# Altium PCB PCB.PcbDoc
Units mm, origin at the board's own origin, x right, y up, seen from the top; angles counter-clockwise.
Board outline 62.03 x 125.5 mm, 2 copper layers (Top Layer, Bottom Layer); 54 components, 45 nets, 173 pads, 278 vias.
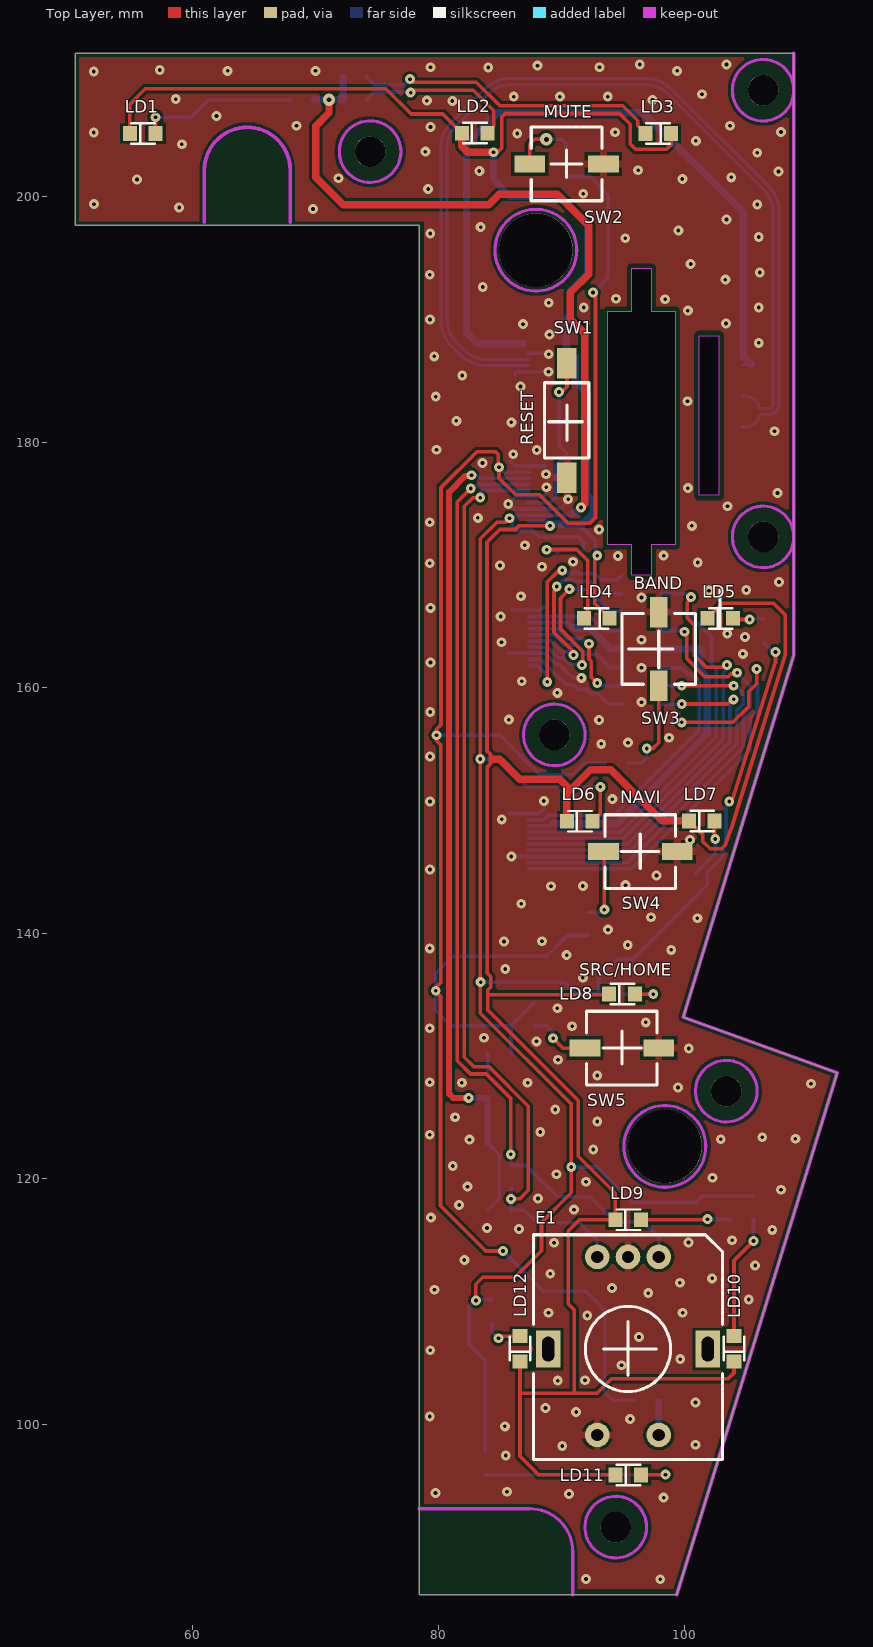
[diagram p0: Top Layer view]
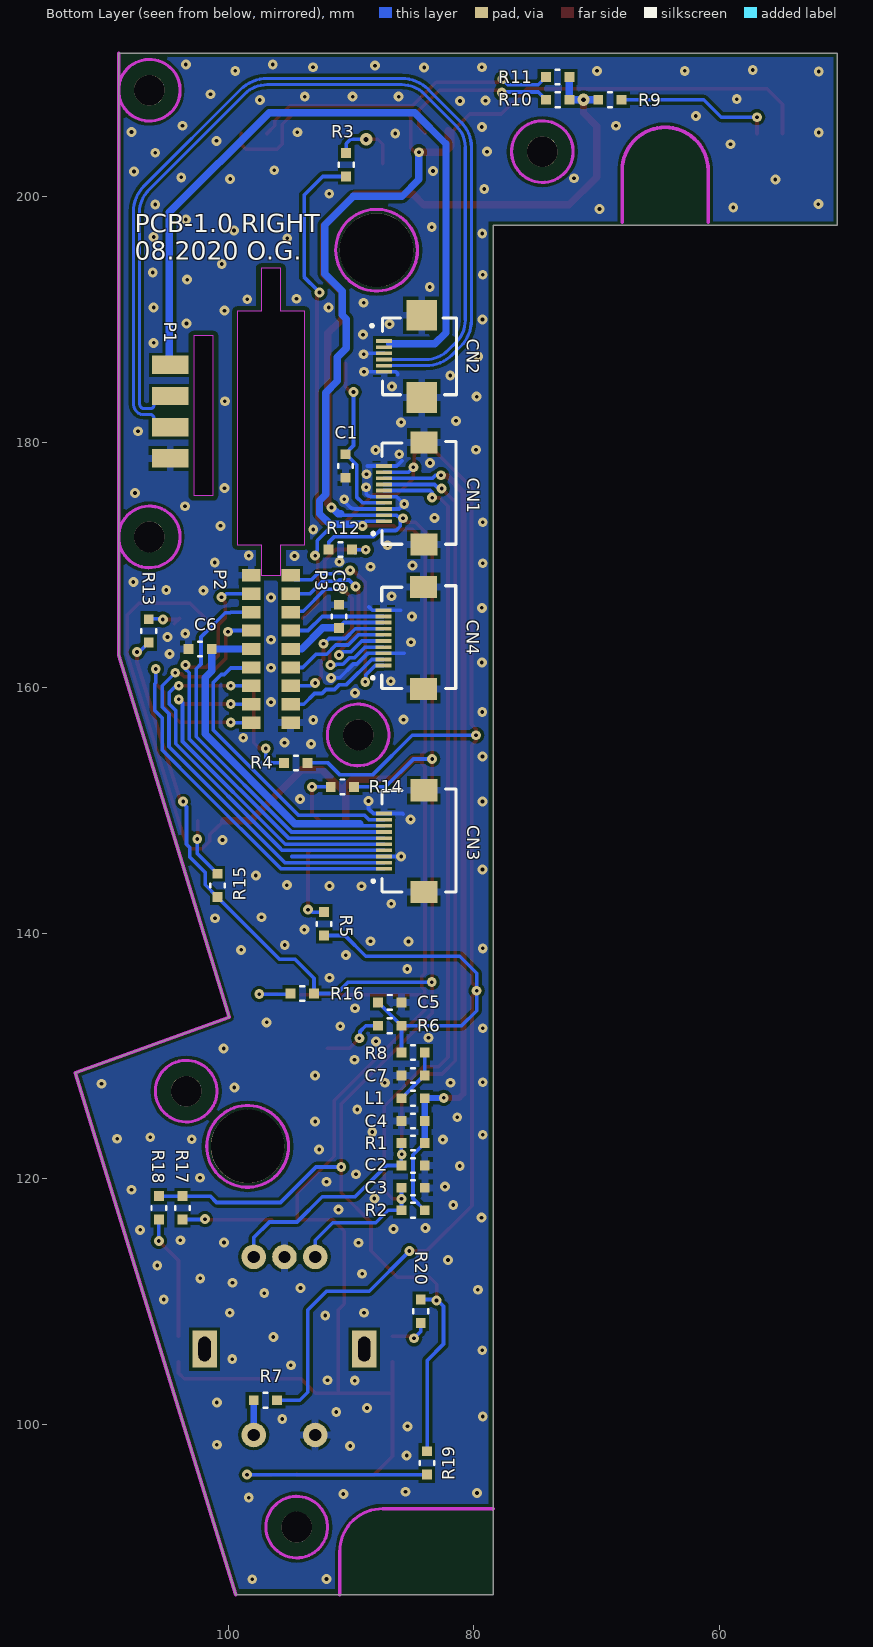
[diagram p1: Bottom Layer view, seen from below]
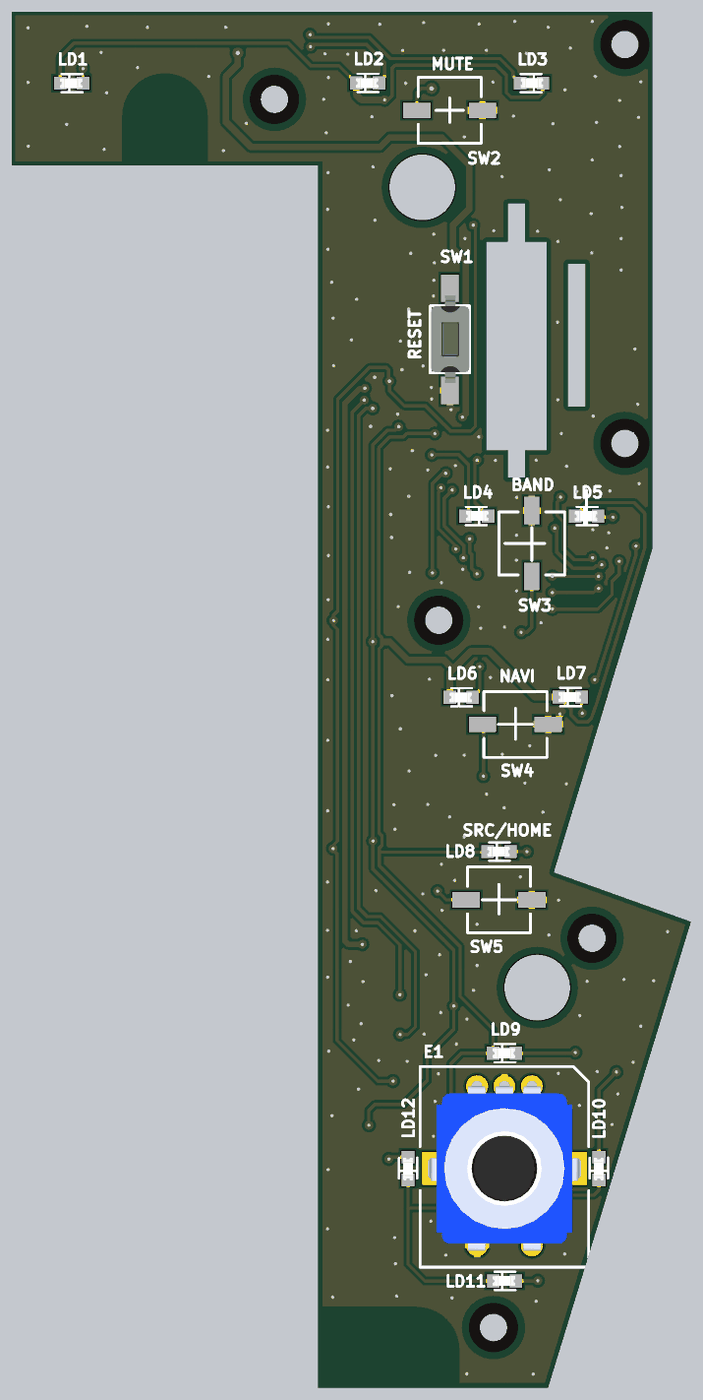
[diagram p2: 3D render of the assembled board from above, using the file's embedded part models]
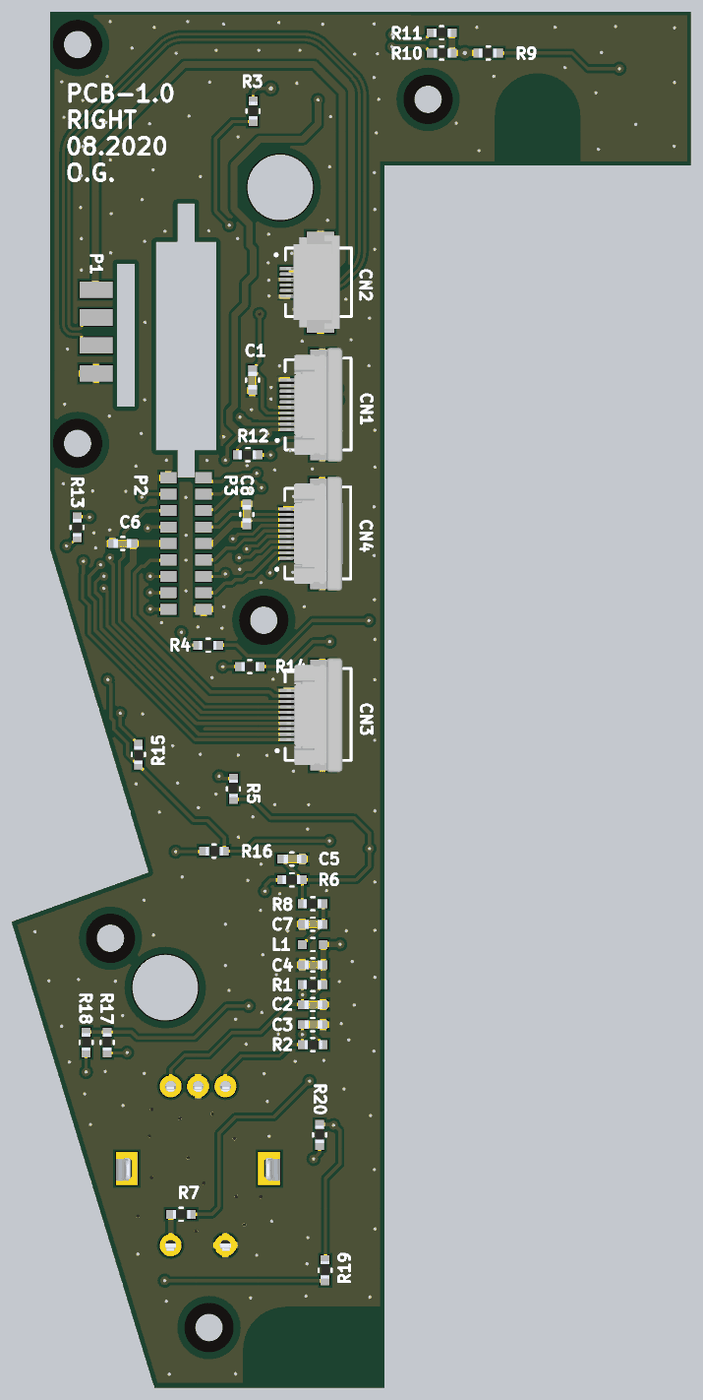
[diagram p3: 3D render of the assembled board from below, using the file's embedded part models]

## Layer stack, top to bottom
Top Solder: solder mask 0.0102, Solder Resist, Dk 3.5
Top Layer: signal copper 0.0356
Dielectric 1: dielectric 0.32, FR-4, Dk 4.8
Bottom Layer: signal copper 0.0356
Bottom Solder: solder mask 0.0102, Solder Resist, Dk 3.5

## Board outline
50.425,211.65 50.425,197.65 78.425,197.65 78.425,86.15 99.4,86.15 112.45,128.65 99.925,133.15 108.925,162.65 108.925,211.65
cut-out: 101.225,188.65 102.825,188.65 102.825,175.65 101.225,175.65
cut-out: 93.775,190.65 95.725,190.65 95.725,194.15 97.325,194.15 97.325,190.65 99.275,190.65 99.275,171.65 97.325,171.65 97.325,169.15 95.725,169.15 95.725,171.65 93.775,171.65

## Design rules (kind name [scope] priority, off if disabled: settings)
Clearance [All] p1: gap=0.2 ignorepadtopadclearanceinfootprint=FALSE except(0.25: Arc-Fill Arc-Poly Arc-Region Track-Fill Track-Poly Track-Region SMDPad-Fill SMDPad-Poly SMDPad-Region THPad-Fill THPad-Poly THPad-Region Via-Fill Via-Poly Via-Region; 0.4: Fill-Fill Fill-Poly Fill-Region Poly-Poly Poly-Region Region-Region)
ComponentClearance [All] p1 off: gap=0.254 collisioncheckmode=3 verticalgap=0.254 showdistances=FALSE
DiffPairsRouting [All] p1: maxlimit=0.25 minlimit=0.25 mostfreqgap=0.25 toplayer_minwidth=0.25 toplayer_maxwidth=0.25 toplayer_prefwidth=0.25 bottomlayer_minwidth=0.25 bottomlayer_maxwidth=0.25 bottomlayer_prefwidth=0.25 maxuncoupledlength=12.7
PolygonConnect [All] p1: thpad.connectstyle=Relief thpad.reliefconductorwidth=0.6 thpad.reliefentries=4 thpad.polygonreliefangle="90 Angle" thpad.airgapwidth=0.254 smdpad.connectstyle=Relief smdpad.reliefconductorwidth=0.6 smdpad.reliefentries=4 smdpad.polygonreliefangle="90 Angle" smdpad.airgapwidth=0.254 via.connectstyle=Direct via.reliefconductorwidth=0.254 via.reliefentries=4 via.polygonreliefangle="90 Angle" via.airgapwidth=0.254
RoomDefinition right_panel [InComponentClass('right_panel')] p1 off: confinementstyle=ConfineIn formatcopy=TRUE lockcomponents=FALSE outline 113.581,87.554 131.75,87.554 131.75,97.5 113.581,97.5
RoutingVias [All] p1: holewidth=0.711 width=1.27 viastyle="Through Hole" minholewidth=0.711 minwidth=1.27 maxholewidth=0.711 maxwidth=1.27
SolderMaskExpansion [All] p1: expansion=0.102
Width [All] p1: maxlimit=2 minlimit=0.3 preferedwidth=0.3 minimp=50.000000 maximp=50.000000 favimp=50.000000
28 further rules are at their usual default settings.

## Classes and differential pairs
differential pair USBD_D: +USBD_D_P -USBD_D_N

## Components (designator, comment, footprint, x,y, rotation, side; value= is the part's Value field where it differs from the comment)
C1 "CL10B103KB8NNNC" C0603 90.45,179 r270 bottom value=0.01uF
C2 "CL10B103KB8NNNC" C0603 85.905,121.1 r180 bottom value=0.01uF
C3 "CL10B103KB8NNNC" C0603 85.9,119.275 r180 bottom value=0.01uF
C4 "CC0603KRX7R9BB104" C0603 85.9,124.725 r180 bottom value=0.1uF
C5 "C1608X7R1H104K080AA" C0603 87.805,134.375 r180 bottom value=0.1uF
C6 "C1608X7R1H104K080AA" C0603 101.345,163.15 r0 bottom value=0.1uF
C7 "C1608X7R1H104K080AA" C0603 85.9,128.425 r180 bottom value=0.1uF
C8 "C1608X7R1H104K080AA" C0603 90.975,164.85 r90 bottom value=0.1uF
CN1 "HDR10" 10S-0.5SH 84.325,175.9 r90 bottom locked
CN2 "USB" 6S-0.5SH 87.3,186.975 r90 bottom locked
CN3 "SDMMC0" 10S-0.5SH 84.325,147.6 r90 bottom locked
CN4 "SDMMC1" 10S-0.5SH 84.35,164.15 r90 bottom locked
E1 "TUNE/EQ" "Rotary Encoder" 95.425,106.15 r180 top locked
L1 "BLM18AG102SN1D" IND0603 83.995,126.575 r0 bottom value=EMIF
LD1 "LED_R" LED0805 54.993,205.125 r0 top locked
LD2 "LED_R" LED0805 82.018,205.15 r0 top locked
LD3 "LED_R" LED0805 98.807,205.125 r180 top locked
LD4 "LED_R" LED0805 93.807,165.65 r180 top locked
LD5 "LED_R" LED0805 102.018,165.65 r0 top locked
LD6 "LED_R" LED0805 90.566,149.125 r0 top
LD7 "LED_R" LED0805 100.518,149.15 r0 top locked
LD8 "LED_R" LED0805 94.018,135.05 r0 top locked
LD9 "LED_R" LED0805 94.518,116.675 r0 top locked
LD10 "LED_R" LED0805 104.05,105.243 r90 top locked
LD11 "LED_R" LED0805 94.525,95.9 r0 top locked
LD12 "LED_R" LED0805 86.625,105.243 r90 top locked
P1 "USB DBG" CUSTOM-4-PADS-2.54 104.725,186.29 r270 bottom locked
P2 "GPS_SD0" CUSTOM-9-PADS-1.5 98.125,163.15 r90 bottom locked
P3 "DVD_SD1" CUSTOM-9-PADS-1.5 94.925,163.15 r90 bottom locked
R1 "10k" R0603 83.995,122.925 r0 bottom
R2 "10k" R0603 85.9,117.45 r180 bottom
R3 "15k" R0603 90.4,201.625 r90 bottom
R4 "10k" R0603 93.545,153.875 r0 bottom
R5 "6.8k" R0603 92.2,139.82 r90 bottom
R6 "3k" R0603 85.9,132.475 r0 bottom
R7 "20k" R0603 97.93,101.975 r180 bottom
R8 "10k" R0603 83.995,130.3 r0 bottom
R9 "620" R0603 67.97,207.875 r0 bottom
R10 "620" R0603 74.125,207.875 r180 bottom
R11 "620" R0603 74.13,209.725 r180 bottom
R12 "620" R0603 89.925,171.25 r0 bottom
R13 "620" R0603 106.475,165.575 r270 bottom
R14 "620" R0603 91.655,151.925 r180 bottom
R15 "620" R0603 100.875,144.85 r270 bottom
R16 "620" R0603 94.925,135.1 r180 bottom
R17 "620" R0603 103.725,116.695 r90 bottom
R18 "620" R0603 105.65,116.695 r90 bottom
R19 "620" R0603 83.825,95.92 r90 bottom
R20 "620" R0603 84.325,108.27 r90 bottom
SW1 "RESET" TACTM-34N-F 90.45,181.65 r90 top locked value="SW tact 2-pin"
SW2 "MUTE" 6X6-SMT-2PIN 90.425,202.65 r180 top locked value="SW tact 2-pin"
SW3 "BAND" 6X6-SMT-2PIN 97.925,163.15 r270 top value="SW tact 2-pin"
SW4 "NAVI" 6X6-SMT-2PIN 96.425,146.65 r180 top locked value="SW tact 2-pin"
SW5 "SRC" 6X6-SMT-2PIN 94.925,130.65 r180 top locked value="SW tact 2-pin"

## Footprints (in the part's own frame and the unit in brackets; to place one, negate y for a bottom-side part, rotate by r counter-clockwise, add the part's x,y. Pads: shape width x height; smd on the part's side, far side on the other; paste and mask are expansions set on the pad)
6S-0.5SH [mm]
  rect 0.3x1.3 smd: 1(1.25,0) 2(0.75,0) 3(0.25,0) 4(-0.25,0) 5(-0.75,0) 6(-1.25,0)
  rect 2.5x2.5 smd: ""(-3.35,-3.05) ""(3.35,-3.05)
  silkscreen extent -3.12,-5.87 3.12,1.1, body extent -4.25,-4.8 4.25,0.1, height 1.9
6X6-SMT-2PIN [mm]
  rect 2.5x1.4 smd: 1(-3,0) 2(3,0)
  silkscreen extent -2.88,-3 2.88,3, body extent -2.88,-3 2.88,2.98, height 5
10S-0.5SH [mm]
  rect 0.3x1.3 smd: 1(-2.35,3) 2(-1.85,3) 3(-1.35,3) 4(-0.85,3) 5(-0.35,3) 6(0.15,3) 7(0.65,3) 8(1.15,3) 9(1.65,3) 10(2.15,3)
  rect 1.8x2.2 smd: ""(-4.25,-0.25) ""(4.05,-0.25)
  silkscreen extent -4.23,-2.88 4.15,3.98, body extent -5.31,-2.11 5.12,3, height 2.1
C0603 [mm]
  rect 0.8x0.8 smd: 1(1.905,0) 2(0,0)
  silkscreen extent 0.8,-0.6 1.1,0.6, body extent 0.2,-0.4 1.8,0.4, height 0.9
CUSTOM-4-PADS-2.54 [mm] "Connector; Header; 4 Position"
  rect 1.5x3 smd: 1(0,0) 2(2.54,0) 3(5.08,0) 4(7.62,0)
CUSTOM-9-PADS-1.5 [mm] "9 Positions"
  rect 1x1.5 smd: 1(-6,0) 2(-4.5,0) 3(-3,0) 4(-1.5,0) 5(0,0) 6(1.5,0) 7(3,0) 8(4.5,0) 9(6,0)
IND0603 [mm]
  rect 0.8x0.8 smd: 1(1.905,0) 2(0,0)
  silkscreen extent 0.8,-0.6 1.1,0.6
LED0805 [mm]
  rect 1.14x1.2 smd: 1(-0.127,0) 2(1.957,0)
  silkscreen extent 0,-0.83 1.91,0.84, body extent -0.16,-0.46 1.9,0.45, height 0.85
R0603 [mm]
  rect 0.8x0.8 smd: 1(1.905,0) 2(0,0)
  silkscreen extent 0.8,-0.6 1.1,0.6, body extent 0.2,-0.4 1.8,0.4, height 0.5
"Rotary Encoder" [mm] "Rotary Encoder - SW"
  round 2 hole 1: 1(-2.5,-7.5) 2(0,-7.5) 3(2.5,-7.5) 4(2.5,7) 5(-2.5,7)
  rect 2x3 hole 1 slot 2 at 90 deg: MP1(-6.5,0) MP2(6.5,0)
  silkscreen extent -7.7,-9.3 7.7,9, body extent -7.5,-7.5 7.5,7.5, height 16.2
TACTM-34N-F [mm]
  rect 2.5x1.6 smd: 1(-4.545,0) 2(4.778,0)
  silkscreen extent -2.95,-1.78 3.17,1.82, body extent -3.88,-1.78 4.13,1.73, height 5.5

## Part data
C1 C2 C3 C4 C5 C6 C7 C8: library part CAP_NPOL, "CAP_NPOL"
CN1 CN3 CN4: library part "HDR 10", "Header, 10-Pin", LatestRevisionDate=17-Jul-2002, LatestRevisionNote="Re-released for DXP Platform.", Publisher="Altium Limited"
CN2: library part "HDR 6", "Header, 6-Pin", LatestRevisionDate=17-Jul-2002, LatestRevisionNote="Re-released for DXP Platform.", Publisher="Altium Limited"
E1: library part ENC_SW, "ENC_SW"
L1: library part IND_WO_IRON, "IND_WO_IRON"
LD1 LD2 LD3 LD4 LD5 LD6 LD7 LD8 LD9 LD10 LD11 LD12: library part LED_RED, "LED Red"
P1: library part "HDR 4", "Header, 4-Pin", LatestRevisionDate=17-Jul-2002, LatestRevisionNote="Re-released for DXP Platform.", Publisher="Altium Limited"
P2 P3: library part "HDR 9", "Header, 9-Pin", LatestRevisionDate=17-Jul-2002, LatestRevisionNote="Re-released for DXP Platform.", Publisher="Altium Limited"
R1 R2 R3 R4 R5 R6 R7 R8 R9 R10 R11 R12 R13 R14 R15 R16 R17 R18 R19 R20: library part RESISTOR, "RES"
SW1 SW2 SW3 SW4 SW5: library part "SW tact 2-pin", "Microswitches, DTSMB-3 series"

## Free pads (board coordinates)
  round 2.5 hole 2.5 unplated mask+1: MH(74.425,203.65) MH(89.425,156.15) MH(94.425,91.65) MH(103.425,127.15) MH(106.425,172.275) MH(106.425,208.65)
  round 6 hole 6 unplated: MH(87.925,195.625) MH(98.425,122.65)

## Via types
v1: diameter 0.8, hole 0.3, Top Layer to Bottom Layer, tented both sides, 276 vias
v2: diameter 1, hole 0.4, Top Layer to Bottom Layer, tented both sides, 2 vias

## Nets (pads, with @x,y where several pads share a name; then routed paths per layer and width w, separated by ;. In a path a pad name is that pad's centre, name@x,y a point inside that pad or via, vN(x,y) a via of type N, cw(c..) or ccw(c..) an arc to the next point about the centre after c; other vN are vias at no path point)
ENC_TUNE_A: C2.2 CN1.7 E1.1 R1.1 | length 79.9
  Top Layer w0.3: v1(82.625,176.225) 81.525,175.125 81.525,129.625 82.6,128.55 83.875,128.55 85.875,126.55 v1(85.875,122)
  Bottom Layer w0.3: v1(82.625,176.225) 82.875,176.225 83.2,176.55 CN1.7 ; R1.1 85.905,122.92 C2.2 87.125,121.1 89.675,118.55 92.35,118.55 94.4,116.5 96.65,116.5 97.925,115.225 E1.1
ENC_TUNE_B: C3.2 CN1.6 E1.3 R2.2 | length 77.5
  Top Layer w0.3: v1(83.4,175.475) 82.8,175.475 82.1,174.775 82.1,129.9 82.875,129.125 84.1,129.125 87.3,125.925 87.3,119.075 86.6,118.375 v1(85.9,118.375)
  Bottom Layer w0.3: v1(83.4,175.475) 83.4,175.9 83.55,176.05 CN1.6 ; C3.2 v1(85.9,118.375) R2.2 86.975,117.45 88,116.425 91.5,116.425 92.925,115 E1.3
GND: C1.1 C2.1 C3.1 C4.2 C5.1 C6.1 C7.2 C8.1 CN1. CN1.3 CN1.5 CN1.10 CN2. CN2.3 CN2.6 CN3. CN3.3 CN3.10 CN4. CN4.3 CN4.10 E1.2 E1.4 P1.4 P2.9 P3.1 SW1.1 SW2.1 SW3.1 SW4.1 SW5.1 | length 39.1
  Bottom Layer w0.3: 85.675,162.8 CN4.3 88.668,162.8 89.543,161.925 89.8,161.925 90.925,160.8 v1(91.625,160.8) ; 85.75,149.7 85.8,149.75 CN3.10 88.174,149.75 88.575,150.151 v1(88.575,150.775) ; 85.85,178.475 86.275,178.05 CN1.10 88.675,178.05 ; v1(85.925,146.25) CN3.3 94.825,146.25 ; 85.95,166.3 CN4.10 88.275,166.3 88.55,166.575 ; 86.2,185.475 86.2,185.574 86.351,185.725 CN2.6 v1(88.95,185.725) ; CN2.3 88.9,187.225 v1(88.975,187.15) ; v1(88.775,176.325) 88.775,175.75 cw(c88.292,176.233) 88.292,175.55 CN1.5 86.275,175.55 v1(85.675,174.95) 85.701,174.95 86.101,174.55 CN1.3 89.667,174.55 ccw(c89.667,175.233) 90.15,174.75 90.409,175.009 ccw(c90.067,175.35) v1(90.55,175.35)
  other v1: 98.05,87.4 92,87.425 98.325,94.05 90.625,94.35 79.75,94.425 85.575,94.525 85.475,97.475 90.075,98.25 100.925,98.35 85.4,99.85 95.6,100.45 79.275,100.65 91.2,101.025 88.7,101.35 100.925,101.8 89.7,103.575 91.925,103.6 94.9,104.825 99.675,105.325 79.325,106.05 96.325,107.125 92.1,108.875 88.95,109.1 99.875,109.1 105.25,110.175 97.075,110.7 79.675,110.975 94.125,111.125 99.65,111.55 102.275,111.9 89.1,112.275 105.775,112.95 82.1,113.4 89.4,114.8 100.35,114.825 103.9,115 107.175,115.85 86.55,115.925 83.95,116 79.375,116.85 91.025,117.5 81.675,117.875 88.1,118.4 107.875,119.125 82.35,119.375 92,119.775 102.3,120.1 89.6,120.375 81.15,121.05 92.6,122.4 82.525,123.2 102.975,123.225 109.05,123.275 106.35,123.4 79.275,123.6 88.275,123.825 92.925,124.675 81.35,125.025 89.5,125.65 99.5,127.45 110.325,127.75 81.9,127.825 87.25,127.825 79.275,127.875 92.925,128.425 89.725,129.7 100.375,130.625 87.975,131.2 83.7,131.5 79.275,132.275 90.875,132.425 96.875,132.75 89.675,133.9 91.75,136.375 85.425,137.1 90.425,138.225 98.95,138.65 79.275,138.775 95.4,139.05 85.325,139.325 88.425,139.35 93.8,140.3 101.075,141.225 97.3,141.3 86.725,142.4 89.15,143.825 91.75,143.85 95.225,143.925 97.75,144.7 79.3,145.2 100.475,147.6 85.15,149.275 79.3,150.725 94.15,150.925 79.3,154.4 93.25,155.425 95.425,155.525 98.775,155.925 93.075,157.375 85.725,157.4 79.325,158.025 96.525,158.825 89.675,159.575 86.775,160.525 96.525,161.625 79.35,162.05 104.775,162.75 85.125,163.7 96.525,163.9 104.95,164.125 103.5,164.4 85.05,165.8 79.35,166.5 96.525,167.35 86.7,167.45 102.025,167.9 105.05,167.95 107.725,168.6 88.425,169.85 85,169.95 79.275,170.125 101.1,170.2 90.95,170.25 94.6,170.725 98.325,170.75 87.025,171.6 93.075,172.875 100.625,173.175 79.275,173.475 83.2,173.825 103.525,174.775 107.6,175.85 100.3,176.25 88.75,177.375 83.575,178.3 86.075,179 88,179.35 79.825,179.375 107.35,180.875 85.925,181.6 81.45,181.725 100.275,183.325 79.775,183.7 86.675,184.525 81.925,185.425 79.65,186.975 106.075,188.075 89.025,188.75 86.875,189.6 103.4,189.65 79.3,189.975 100.3,190.7 91.825,190.95 106.075,190.95 88.975,191.35 98.45,191.625 94.45,191.675 83.6,192.625 103.35,193.225 79.275,193.625 106.15,193.8 100.525,194.5 95.2,196.6 106.075,196.7 79.325,196.975 99.525,197.225 83.425,197.5 103.45,198.125 69.775,198.975 58.875,199.1 105.95,199.35 51.95,199.375 91.775,200.225 79.15,200.6 55.45,201.375 99.85,201.425 71.85,201.475 103.825,201.55 107.675,202.025 83.325,202.075 96.25,202.125 105.95,203.55 78.925,203.65 59.1,204.25 100.95,204.525 86.4,205.125 51.925,205.2 94.375,205.225 107.875,205.25 79.35,205.65 68.425,205.75 103.725,205.75 61.925,206.55 81.125,207.775 79.05,207.8 97.425,207.85 58.6,207.925 86.125,208.125 89.875,208.125 93.775,208.125 101.45,208.325 51.925,210.175 62.825,210.225 69.975,210.225 99.425,210.225 57.3,210.3 84.05,210.5 79.35,210.525 93.1,210.525 88.05,210.65 96.375,210.75 103.45,210.75
KEYS: C5.2 CN1.9 R3.2 R4.2 R5.2 R6.2 R7.1 R8.1 | length 180.3
  Top Layer w0.3: v1@79.525,135.35 80.175,136 80.175,155.325 79.825,155.675 v1(79.825,156.125) 79.825,156.625 80.2,157 80.2,176.3 83.1,179.2 84.65,179.2 84.861,178.989 84.861,178.014 v1(84.925,177.95) 84.925,177.05 86.275,175.7 88.225,175.7 90.525,173.4 92.325,173.4 92.775,173.85 92.775,191.975 v1(92.575,192.175) ; v1(79.775,135.325) 79.775,135.225 80.15,134.85 80.15,117.825 83.85,114.125 v1(85.25,114.125) v1@85.5,114.125
  Bottom Layer w0.3: v1(79.825,156.125) 85.025,156.125 88.25,152.9 90.9,152.9 91.875,153.875 R4.2 ; v1(84.925,177.95) 85.325,177.55 CN1.9 ; v1(85.25,114.125) 88.525,110.85 92,110.85 93.525,109.325 93.525,102.625 94.175,101.975 R7.1 ; R8.1 R6.2 ; C5.2 87.555,134.125 87.55,134.125 R6.2 ; R3.2 92.3,201.625 93.825,200.1 93.825,193.45 v1@92.65,192.275 ; R5.2 90.495,139.82 88.8,138.125 81.15,138.125 79.775,136.75 v1(79.775,135.325) 79.775,133.7 81,132.475 R6.2
LED_A: CN1.2 R9.1 R10.1 R11.1 R12.1 R13.1 R14.1 R15.1 R16.1 R17.1 R18.1 R19.1 R20.1 | length 229.1
  Top Layer w0.3: v1(83.05,110.1) 83.025,110.125 83.025,111.425 83.6,112 86.225,112 88.375,114.15 88.375,116.45 90.8,118.875 v1(90.8,120.975) 90.8,126.1 83.4,133.5 83.4,136.025 v1(83.4,154.2) 83.4,172.125 84.75,173.475 85.45,173.475 v1(85.775,173.8) ; v1@103.525,150.75 103.633,150.806 103.94,150.966 107.43,162.055 v1(107.43,162.908)
  Top Layer w0.6: v2(71.075,207.875) 71.075,206.8 70,205.725 70,201.575 72.25,199.325 84.1,199.325 84.95,200.175 89.675,200.175 92.225,197.625 92.225,193.675 90.725,192.175 90.725,190.025 91.5,189.25 91.55,189.25 91.55,189.224 91.9,188.874 91.9,174.975 v1(91.6,174.675)
  Bottom Layer w0.3: R10.1 R10.1@72.225,207.88 ; v1(83.4,154.2) 84.925,154.2 87.2,151.925 R14.1 ; v1(83.425,136.025) 90.225,136.025 91.15,135.1 R16.1 93.02,136.345 94.55,137.875 95.805,137.875 R15.1 101.875,143.945 101.875,144.95 103.125,146.2 103.125,146.975 103.4,147.25 103.4,150.315 103.675,150.59 v1(103.675,150.725) ; R19.1 83.8,97.85 83.8,105.225 82.475,106.55 82.475,109.625 83.025,110.175 R20.1 ; v1(90.8,120.975) 92.85,120.975 95.75,118.075 100.95,118.075 101.475,118.6 R17.1 R18.1 ; 90.85,174.175 90.725,174.05 CN1.2 86.3,174.05 86,173.75 86,173.15 86.35,172.8 87.65,172.8 88.15,172.3 91.35,172.3 91.83,171.82 R12.1 ; v1@91.55,174.675 v1(91.6,174.675) ; R13.1 107.141,163.004 107.335,163.004 v1(107.43,162.908)
  Bottom Layer w0.6: R9.1 v2(71.075,207.875) R10.1 ; R10.1@72.225,207.88 R11.1 ; 90.85,174.175 91.05,174.175 v1@91.55,174.675
LED_K: CN1.1 LD1.1 LD2.1 LD3.1 LD4.1 LD5.1 LD6.1 LD7.1 LD8.1 LD9.1 LD10.1 LD11.1 LD12.1 | length 289.6
  Top Layer w0.3: LD1.1 54.866,207.516 56.125,208.775 75.7,208.775 77.766,206.709 80.332,206.709 81.883,205.158 LD2.1 ; 84.375,154.175 84.363,154.187 84.225,154.187 ; v1(84.475,203.6) 84.8,203.6 85.15,203.95 85.15,206.475 85.425,206.75 94.725,206.75 95.6,205.875 95.6,204.275 96.025,203.85 98.55,203.85 98.934,204.234 LD3.1 ; LD12.1 86.625,102.55 ; v1(89.075,173.175) 86.525,173.175 86.225,172.875 84.975,172.875 83.95,171.85 83.95,154.85 84.225,154.575 84.225,154.187 ; v1(92.925,170.75) 92.925,170.625 92.725,170.425 92.725,166.859 93.484,166.1 93.514,166.1 93.934,165.68 LD4.1 ; LD8.1@94.075,135 84,135 ; LD11.1@94.424,95.926 LD11.1 88.15,95.9 86.625,97.425 86.625,102.55 ; LD7.1 100.391,149.12 100.811,148.7 100.841,148.7 101.5,148.041 101.5,147.5 102.125,146.875 103.05,146.875 103.35,147.175 103.851,148.575 108.225,162.699 108.225,165.925 107.275,166.875 103.116,166.875 102.341,166.1 102.311,166.1 101.891,165.68 LD5.1 ; LD10.1 104.05,104.2 103.575,103.725 94.075,103.725 92.9,102.55 91.05,102.55 ; 84,135 84,133.75 91.122,126.628 91.125,126.628 91.375,126.378 91.375,121.85 94.391,118.834 LD9.1 91.475,116.675 90.55,115.75 90.55,109.825 91.05,109.325 91.05,102.55 ; 84,135 84,135.375 84.25,135.625 84.25,136.475 83.975,136.75 83.975,153.55 84.225,153.8 84.225,154.187 ; 86.625,102.55 91.05,102.55
  Top Layer w0.6: LD2.1@81.883,205.158 82.075,205.35 LD2.1@82.075,204.9 ; LD2.1 81.891,204.084 82.375,203.6 v1(84.475,203.6) ; 84.375,154.175 84.975,154.175 86.6,152.55 89.875,152.55 90.6,151.825 ; LD6.1 90.439,151.389 92.375,153.325 94.025,153.325 98.2,149.15 LD7.1
  Bottom Layer w0.3: CN1.1 88.8,173.55 v1@89.05,173.3 ; 91.563,173.163 92.75,171.975 92.75,171.176 93.176,170.75 v1(92.925,170.75)
  Bottom Layer w0.6: v1(84.475,203.6) 84.475,201.375 85.85,200 89.825,200 92.15,197.675 92.15,193.7 90.725,192.275 90.725,190.35 90.4,190.025 90.4,187.625 91.125,186.9 91.125,184.975 92.075,184.025 92.075,175.725 92.575,175.225 92.575,174.175 91.7,173.3 ; v1@89.05,173.3 91.7,173.3 ; 91.563,173.163 91.7,173.3
NetC7_1: C7.1 L1.1 R8.2 | length 4.5
  Bottom Layer w0.3: R8.2 C7.1 84.245,128.175 84.3,128.175 L1.1
NetE1_5: E1.5 R7.2 | length 2.9
  Bottom Layer w0.3: R7.2 R7.2@98.025,101.88
  Bottom Layer w0.5: E1.5 R7.2@97.925,101.88
NetLD1_2: LD1.2 R9.2 | length 13
  Top Layer w0.3: LD1.2 56.95,206.465 v1(56.95,206.45)
  Bottom Layer w0.3: v1(56.95,206.45) 59.85,206.45 61.275,207.875 R9.2
NetLD2_2: LD2.2 R10.2 | length 13.8
  Top Layer w0.3: v1(77.725,208.45) 77.925,208.65 82.825,208.65 84.5,206.975 84.5,205.75 84.3,205.55 84.3,205.475 LD2.2
  Bottom Layer w0.3: R10.2 74.75,208.5 77.435,208.5 77.725,208.21 v1(77.725,208.45)
NetLD3_2: LD3.2 R11.2 | length 25.2
  Top Layer w0.3: v1(77.675,209.55) 77.925,209.3 83.075,209.3 85,207.375 95,207.375 96.212,206.163 96.212,205.762 LD3.2
  Bottom Layer w0.3: R11.2 74.755,209.1 77.225,209.1 v1(77.675,209.55)
NetLD4_2: LD4.2 R12.2 | length 10
  Top Layer w0.3: v1(88.8,171.225) 88.825,171.25 91.25,171.25 92.15,170.35 92.15,165.95 LD4.2
  Bottom Layer w0.3: v1(88.8,171.225) 89.675,171.225 89.675,171 R12.2
NetLD5_2: LD5.2 R13.2 | length 3.5
  Top Layer w0.3: LD5.2@104.395,165.2 103.975,165.62 LD5.2 104.075,165.55 v1(105.325,165.55)
  Bottom Layer w0.3: v1(105.325,165.55) 105.176,165.55 105.226,165.6 R13.2@106.475,165.6
NetLD6_2: LD6.2 R14.2 | length 4.6
  Top Layer w0.3: LD6.2 93.175,149.777 v1(93.175,151.925)
  Bottom Layer w0.3: R14.2 v1(93.175,151.925)
NetLD7_2: LD7.2 R15.2 | length 4.7
  Top Layer w0.3: v1@102.475,147.951 LD7.2
  Bottom Layer w0.3: R15.2 102.525,146.5 v1(102.525,147.675)
NetLD8_2: LD8.2 R16.2 | length 4.1
  Top Layer w0.3: LD8.2 v1(97.475,135.05)
  Bottom Layer w0.3: R16.2 94.975,135.05 v1(97.475,135.05)
NetLD9_2: LD9.2 R17.2 | length 7.3
  Top Layer w0.3: LD9.2 101.85,116.675 v1(101.9,116.725)
  Bottom Layer w0.3: v1(101.9,116.725) 101.93,116.695 R17.2
NetLD10_2: LD10.2 R18.2 | length 10.2
  Top Layer w0.3: LD10.2 104.05,113.35 v1(105.65,114.95)
  Bottom Layer w0.3: v1(105.65,114.95) R18.2
NetLD11_2: LD11.2 R19.2 | length 16.7
  Top Layer w0.3: LD11.2 98.45,95.9 v1(98.475,95.925)
  Bottom Layer w0.3: R19.2 98.47,95.92 v1(98.475,95.925)
NetLD12_2: LD12.2 R20.2 | length 3.3
  Top Layer w0.3: v1(84.875,107.025) 85.01,107.025 85.185,107.2 LD12.2
  Bottom Layer w0.3: R20.2 84.325,107.575 v1(84.875,107.025)
NetR3_1: R3.1 SW2.2 | length 5.7
  Top Layer w0.3: SW2.2 87.425,204.25 87.825,204.65 v2(88.775,204.65)
  Bottom Layer w0.3: v2(88.775,204.65) 90.05,204.65 90.4,204.3 R3.1
NetR4_1: R4.1 SW3.2 | length 8.2
  Top Layer w0.3: v1(96.95,155.05) 97.45,155.05 97.925,155.525 SW3.2
  Bottom Layer w0.3: R4.1 96.525,153.875 96.95,154.3 v1(96.95,155.05)
NetR5_1: R5.1 SW4.2 | length 6.1
  Top Layer w0.3: SW4.2 93.5,146.575 v1(93.5,141.925)
  Bottom Layer w0.3: R5.1 93.165,141.725 93.365,141.925 v1(93.5,141.925)
NetR6_1: R6.1 SW5.2 | length 5.2
  Top Layer w0.3: v1(89.325,131.45) 90.125,130.65 SW5.2
  Bottom Layer w0.3: R6.1 88.8,132.475 89.274,132.001 89.274,131.501 v1(89.325,131.45)
RESET_BTN: C1.2 CN1.4 SW1.2 | length 14.3
  Top Layer w0.3: v1(89.8,184.075) 90.025,184.075 90.45,184.5 SW1.2
  Bottom Layer w0.3: CN1.4 89.075,175.05 89.55,175.525 89.55,178.15 90.15,178.75 90.2,178.75 C1.2@90.425,178.975 ; v1(89.8,184.075) 89.8,179.725 C1.2@90.475,179.05
SD0_CLK: CN3.9 P2.4 | length 24.4
  Bottom Layer w0.3: CN3.9 88.55,149.25 88.925,149.625 94.3,149.625 101.225,156.55 101.225,160.425 100.575,161.075 100.325,161.075 99.8,161.6 98.175,161.6 P2.4
SD0_CMD: CN3.2 P2.6 | length 37.1
  Top Layer w0.3: v1(100.025,164.55) 100.2,164.375 100.2,162.375 101.675,160.9 103.586,160.9 103.804,161.119 104.219,161.119 v1(104.313,161.212)
  Bottom Layer w0.3: CN3.2 95.375,145.75 104.825,155.2 104.825,157.875 105.375,158.425 105.375,160.15 v1(104.313,161.212) ; P2.6 99.79,164.65 99.89,164.55 v1(100.025,164.55)
SD0_D0: CN3.4 P2.3 | length 31.8
  Top Layer w0.3: v1(99.8,160.15) v1(104.025,160.15)
  Bottom Layer w0.3: CN3.4 95.443,146.75 95.6,146.75 95.875,147.025 104.275,155.425 104.275,158.15 104.8,158.675 104.8,159.6 104.25,160.15 v1(104.025,160.15) ; P2.3 v1(99.8,160.15)
SD0_D1: CN3.5 P2.2 | length 29.9
  Top Layer w0.3: v1(99.8,158.675) 103.549,158.675 103.924,159.05 v1(104.025,159.05)
  Bottom Layer w0.3: CN3.5 95.35,147.25 103.725,155.625 103.725,158.75 v1(104.025,159.05) ; P2.2 100.025,158.65 100,158.675 v1(99.8,158.675)
SD0_D2: CN3.6 P2.8 | length 36.1
  Top Layer w0.3: v1(100.55,167.375) 100.55,167.24 100.25,166.94 100.25,165.675 100.825,165.1 100.825,162.625 101.775,161.675 103.3,161.675 v1(103.475,161.85)
  Bottom Layer w0.3: CN3.6 95.1,147.75 103.175,155.825 103.175,161.225 103.475,161.525 v1(103.475,161.85) ; P2.8 100.14,167.65 100.415,167.375 v1(100.55,167.375)
SD0_D3: CN3.7 P2.7 | length 31.7
  Bottom Layer w0.3: CN3.7 94.85,148.25 102.6,156 102.6,161.55 102.225,161.925 102.225,164.125 100.25,166.1 99.825,166.1 99.775,166.15 P2.7
SD0_DET#: CN3.1 P2.1 | length 40.4
  Top Layer w0.3: v1(99.8,157.175) 103.95,157.175 105.25,158.475 105.25,159.675 105.9,160.325 v1(105.9,161.525)
  Bottom Layer w0.3: CN3.1 95.7,145.25 102.393,151.943 105.375,154.925 105.375,157.525 105.975,158.125 105.975,160.325 105.9,160.4 v1(105.9,161.525) ; P2.1 100.05,157.15 100.025,157.175 v1(99.8,157.175)
SD0_VDD: C6.2 CN3.8 P2.5 | length 28
  Bottom Layer w0.3: CN3.8 89.125,148.75 89.3,148.925
  Bottom Layer w0.6: 89.3,148.925 94.575,148.925 101.875,156.225 101.875,160.825 101.345,161.355 C6.2 P2.5
SD1_CLK: CN4.9 P3.6 | length 8.1
  Bottom Layer w0.3: CN4.9 92.35,165.8 93.5,164.65 P3.6
SD1_CMD: CN4.2 P3.2 | length 9.1
  Bottom Layer w0.3: CN4.2 88.325,162.3 90.375,160.25 90.95,160.25 91.35,159.85 92.05,159.85 92.375,159.525 92.975,159.525 93.85,158.65 P3.2
SD1_D0: CN4.4 P3.7 | length 17.2
  Top Layer w0.3: v1(90.65,168.025) 90.65,168.014 89.925,167.289 89.925,164.773 91.729,162.969 91.729,161.904 v1(91.675,161.85)
  Bottom Layer w0.3: CN4.4 88.875,163.3 89.75,162.425 90.15,162.425 90.667,161.908 91.192,161.908 91.25,161.85 v1(91.675,161.85) ; v1(90.65,168.025) 92.1,168.025 93.901,166.224 94.851,166.224 P3.7
SD1_D1: CN4.5 P3.8 | length 16.4
  Top Layer w0.3: v1(89.629,168.233) 89.629,168.054 89.4,167.825 89.4,164.5 90.979,162.921 v1(90.979,162.658) v1@91,162.678
  Bottom Layer w0.3: CN4.5 89.125,163.8 90,162.925 90.712,162.925 v1(90.979,162.658) ; v1(89.629,168.233) 90.171,168.775 90.961,168.775 91.061,168.675 92.325,168.675 93.35,167.65 P3.8
SD1_D2: CN4.6 P3.4 | length 8.7
  Bottom Layer w0.3: CN4.6 89.4,164.3 90.225,163.475 91.239,163.475 91.989,162.725 92.85,162.725 93.925,161.65 P3.4
SD1_D3: CN4.7 P3.3 | length 11
  Top Layer w0.3: v1(92.25,163.575) 92.25,162.336 92.425,162.161 92.425,160.875 v1(92.925,160.375)
  Bottom Layer w0.3: CN4.7 89.65,164.8 90.45,164 91.775,164 92.2,163.575 v1(92.25,163.575) ; v1(92.925,160.375) 93.075,160.375 93.3,160.15 P3.3
SD1_DET#: CN4.1 P3.9 | length 17.4
  Top Layer w0.3: v1(88.85,160.475) 88.85,168.6 89.8,169.55 v1(90.075,169.55)
  Bottom Layer w0.3: CN4.1 88.025,161.8 88.799,161.026 88.799,160.526 v1(88.85,160.475) ; v1(90.075,169.55) 90.25,169.375 91.375,169.375 91.475,169.275 92.725,169.275 93.2,168.8 94.575,168.8 P3.9
SD1_VDD: C8.2 CN4.8 P3.5 | length 8.5
  Bottom Layer w0.3: CN4.8 90.575,165.3 C8.2@90.975,164.9
  Bottom Layer w0.6: C8.2@90.975,164.875 92.3,164.875 94.025,163.15 P3.5
USBD_D_N: CN2.4 P1.2 | length 74.9
  Bottom Layer w0.25: CN2.4 83.902,186.725 cw(c83.902,189.265) 82.106,187.469 81.442,188.133 cw(c83.235,189.925) 80.7,189.925 80.7,204.01 cw(c83.09,204.01) 81.4,205.7 84.056,208.356 cw(c85.852,206.56) 85.852,209.1 96.848,209.1 cw(c96.848,206.56) 98.644,208.356 106.481,200.519 cw(c104.685,198.723) 107.225,198.723 107.225,183.162 cw(c106.713,183.162) 107.075,182.8 cw(c106.906,182.969) 106.906,182.73 106.309,182.73 cw(c106.309,182.98) 106.132,182.803 cw(c106.309,182.98) 106.059,182.98 106.059,183.001 ccw(c105.759,183.001) 105.971,183.213 105.746,183.438 ccw(c104.992,182.683) 104.992,183.75 P1.2
USBD_D_P: CN2.5 P1.3 | length 78.1
  Bottom Layer w0.25: CN2.5 83.901,186.225 cw(c83.901,189.261) 81.754,187.114 81.088,187.78 cw(c83.231,189.923) 80.2,189.923 80.2,204.014 cw(c83.081,204.014) 81.044,206.051 83.704,208.711 cw(c85.85,206.566) 85.85,209.6 96.85,209.6 cw(c96.85,206.565) 98.996,208.711 106.837,200.87 cw(c104.695,198.727) 107.725,198.727 107.725,183.16 cw(c106.718,183.16) 107.43,182.448 107.428,182.446 cw(c106.907,182.967) 106.907,182.23 106.309,182.23 ccw(c106.309,181.98) 106.132,182.157 ccw(c106.309,181.98) 106.059,181.98 106.059,181.959 cw(c105.759,181.959) 105.971,181.747 105.746,181.523 cw(c104.992,182.277) 104.992,181.21 P1.3
USBD_VBUS: CN2.1 CN2.2 P1.1 | length 60.7
  Bottom Layer w0.2: P1.1 P1.1@105.475,186.29
  Bottom Layer w0.6: 86.875,188 83.175,188 82.275,188.9 82.275,204.275 84.825,206.825 96.675,206.825 104.8,198.7 104.8,186.965 P1.1@105.475,186.29
VDD: C4.1 CN1.8 L1.2 R1.2 R2.1 | length 69.4
  Top Layer w0.3: v1@82.625,177.25 v1(82.675,177.3)
  Top Layer w0.5: v1(82.45,126.6) 81.175,126.6 80.85,126.925 80.85,175.925 82.175,177.25 v1@82.625,177.25
  Bottom Layer w0.3: v1(82.675,177.3) 83.125,177.3 83.375,177.05 CN1.8 ; R2.1 84.95,118.405 84.95,121.97 R1.2
  Bottom Layer w0.5: v1(82.45,126.6) 82.475,126.575 L1.2 C4.1 R1.2
pads on no net: E1.MP1 E1.MP2

## Polygon pours and split planes (outlines as drawn)
GND on Bottom Layer "Bottom Layer-GND" (solid, remove dead copper, pour order 0): 50.75,211.324 50.75,197.975 78.825,197.975 78.825,86.625 112.45,86.625 112.45,211.369
GND on Top Layer "Top Layer-GND" (solid, remove dead copper, pour order 2): 50.75,211.325 50.75,197.975 78.825,197.975 78.825,86.625 112.375,86.625 112.375,211.325

## Keep-outs
Keep-Out Layer:
  circle w0.254: c94.425,91.65 r2.508
  circle w0.254: c103.425,127.15 r2.508
  circle w0.254: c89.425,156.15 r2.508
  circle w0.254: c106.425,172.275 r2.508
  circle w0.254: c98.425,122.65 r3.33
  circle w0.254: c87.925,195.625 r3.33
  circle w0.254: c106.425,208.65 r2.508
  circle w0.254: c74.425,203.65 r2.508
  lines w0.254: 87.4,93.15 cw(c87.436,89.661) 90.925,89.65
  lines w0.3: 60.925,197.925 60.925,202.15 cw(c64.425,202.125) 67.925,202.15 67.925,197.925 ; 78.425,93.15 87.4,93.15 ; 90.925,86.15 90.925,89.65 ; 99.4,86.15 112.45,128.65 99.925,133.175 108.925,162.65 108.925,211.65

## Silkscreen, mask and mechanical layers (free items; w line width, h text height)
Top Overlay:
  lines w0.254: 88.95,181.65 91.725,181.65 ; 89.175,202.65 91.675,202.65 ; 90.425,201.55 90.425,203.775 ; 90.45,180.15 90.45,183.025 ; 93.4,130.65 96.5,130.65 ; 93.45,106.15 97.75,106.15 ; 94.875,146.65 97.95,146.65 ; 94.925,129.375 94.925,132.05 ; 95.425,104 95.425,108.375 ; 95.475,163.15 99.1,163.15 ; 97.925,161.6 97.925,164.6 ; 102.925,164.925 102.925,168 ; 96.425,145.3 96.425,148.1 96.425,145.3
  text "MUTE" at 88.575,206.4 h1
  text "RESET" at 87.725,179.75 h1 r90
  text "BAND" at 95.9,168.025 h1
  text "NAVI" at 94.8,150.575 h1
  text "SRC/HOME" at 91.45,136.525 h1
Bottom Overlay:
  text "PCB-1.0 RIGHT / 08.2020 O.G." at 107.625,194.85 h1.5
Mechanical 1:
  lines w0.254: 99.925,133.15 112.45,128.65 ; 93.775,171.65 95.725,171.65 95.725,169.15 97.325,169.15 97.325,171.65 99.275,171.65 99.275,190.65 97.325,190.65 97.325,194.15 95.725,194.15 95.725,190.65 93.775,190.65 93.775,171.65 ; 101.225,175.65 102.825,175.65 102.825,188.65 101.225,188.65 101.225,175.65
  lines w0.3: 60.9,197.65 50.425,197.65 50.425,211.65 108.925,211.65 108.925,162.65 99.925,133.15 ; 60.925,197.675 60.925,202.15 cw(c64.425,202.15) 67.925,202.15 67.925,197.65 78.425,197.65 78.425,93.15 ; 78.426,93.151 87.4,93.151 cw(c87.425,89.65) 90.926,89.65 90.926,86.151 ; 90.925,86.15 99.425,86.15 112.45,128.65
Mechanical 5:
  lines w0.254: 97.325,190.65 99.275,190.65
Mechanical 15:
  circle w0.254: c95.425,106.15 r12.007